# EAGLE board Lab_5 (EAGLE 9.2.2)
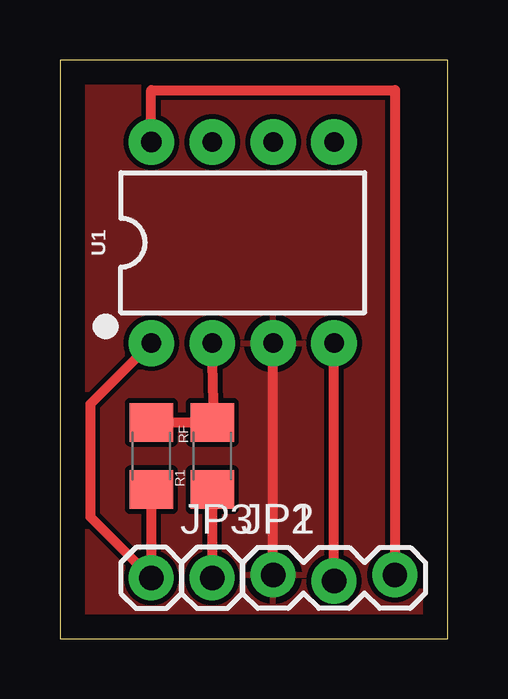
[diagram p0: board, top side]

Size 16.18 x 24.12 mm. Coordinates in mm from the lower left corner, seen from the top.
Outline: 0,0 16.18,0 16.18,24.12 0,24.12 0,0
Copper layers (1*16): Top 0.035mm / dielectric 1.5mm / Bottom 0.035mm
Design rules "default": minimum track width 10mil, minimum drill 24mil, track to track 8mil, track to pad 8mil, pad to pad 8mil, via to via 8mil, smd to smd 8mil, copper to edge 40mil, drill to drill 8mil, minimum pad ring 10mil, minimum via ring 8mil, stop-mask expansion 4mil, vias tented up to drill 0mil, thermal gap 10mil

## Footprints (pad centres in the part's own frame; a part is rotated, then mirrored left to right if it is on the bottom)
1X03_LOCK = drill 1.016 pad 1.88: 1 0,0.127; 2 2.54,-0.127; 3 5.08,0.127
1X01 = drill 1.016 pad 1.88: 1 0,0
1206 = smd 1.6 x 1.8: 1 -1.4,0; 2 1.4,0
DIP08-KIT = drill 0.813 pad 1.905: 1 -3.81,-4.191; 2 -1.27,-4.191; 3 1.27,-4.191; 4 3.81,-4.191; 5 3.81,4.191; 6 1.27,4.191; 7 -1.27,4.191 | drill 0.864 pad 1.905: 8 -3.81,4.191

## Placement (x,y rotation side)
JP1  [1X03_LOCK]  8.89,2.54 0 top
JP2  M01PTH  [1X01]  6.35,2.54 0 top
JP3  M01PTH  [1X01]  3.81,2.54 0 top
R1  100  [1206]  6.35,7.62 90 top
RF  1 K  [1206]  3.81,7.62 270 top
U1  LM358  [DIP08-KIT]  7.62,16.51 0 top

## Library data of the parts
JP1-JP3 R1 RF = SparkFun
U1 = SparkFun-IC-Amplifiers; PROD_ID: IC-09172

## Nets
FDBCK: R1.2 RF.1 U1.2
GND: JP1.1 U1.3
VCC: JP1.3 U1.8
VEE: JP1.2 U1.4
VIN: JP2.1 R1.1
VOUT: JP3.1 RF.2 U1.1

## Tracks (layer width: path | path; a pad name or v marks a point on that pad's centre or on a via)
FDBCK
  Top 0.406: R1.2 6.4,9.84 | 6.4,9.84 6.42,8.95 R1.2 | 6.4,9.84 U1.2 | RF.1 R1.2
GND
  Top 0.406: JP1.1 U1.3
  pour Top: 0,24.13 16.51,24.13 16.51,0 0,0
VCC
  Top 0.406: U1.8 3.81,22.86 13.97,22.86 JP1.3
VEE
  Top 0.406: JP1.2 U1.4
VIN
  Top 0.406: R1.1 JP2.1
VOUT
  Top 0.406: RF.2 JP3.1 1.27,5.08 1.27,9.78 U1.1